# Altium PCB 第二版PCB.pcbdoc (part 2 of 2)
Units mm, origin at the board's own origin, x right, y up, seen from the top; angles counter-clockwise.
Board outline 100 x 24 mm, 4 copper layers (Top Layer, GND, VCC, Bottom Layer), stack 0.568 mm thick; 97 components, 63 nets, 363 pads, 297 vias.
Unrouted connection lines stored in the file: 80.
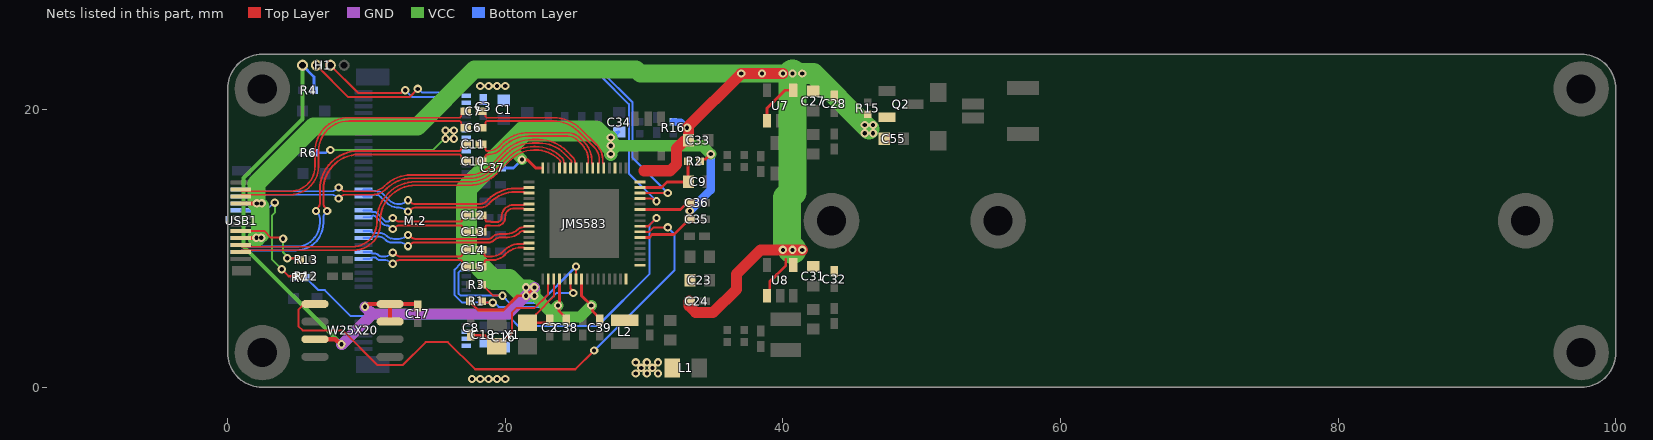
[diagram p4: the nets of this part, all layers, seen from the top]

## Via types
v1: diameter 0.6, hole 0.3, Top Layer to Bottom Layer, tented both sides, 297 vias

## Nets (pads, with @x,y where several pads share a name; then routed paths per layer and width w, separated by ;. In a path a pad name is that pad's centre, name@x,y a point inside that pad or via, vN(x,y) a via of type N, cw(c..) or ccw(c..) an arc to the next point about the centre after c; other vN are vias at no path point) (continued)
GPIO3: JMS583.7 W25X20.1 | length 40.7
  Top Layer w0.15: W25X20.1@6.295,6.005 5.515,6.005 5.095,5.584 5.095,4.405 5.4,4.1 8.3,4.1 10.8,1.6 12.6,1.6 14.26,3.26 15.866,3.26 17.826,1.3 25.05,1.3 v1(26.4,2.65) ; JMS583.7@29.7,11.2 30.366,11.2 30.686,11.52 v1(31.7,11.52)
  Bottom Layer w0.15: v1(26.4,2.65) 32.195,8.445 32.195,11.025 v1@31.705,11.515
GPIO4: JMS583.8 R7.1 | length 33.4
  Top Layer w0.15: JMS583.8@29.7,11.6 30.3,11.6 v1(30.9,12.2)
  Bottom Layer w0.15: R7.1@5.633,7.9 6.508,7.025 6.944,7.025 6.969,7 7,7 8.875,5.125 10.543,5.125 10.703,4.965 20.403,4.965 20.948,4.42 26.643,4.42 30.4,8.177 30.4,11.7 v1(30.9,12.2)
GPIO8: H1.3 JMS583.13 | length 33.2
  Top Layer w0.15: H1.3@7.4,23.2 9.4,21.2 12.487,21.2 12.687,21.4 v1(12.8,21.4) ; JMS583.13@29.7,13.6 30.578,13.6 30.778,13.4 v1(30.9,13.4)
  Bottom Layer w0.15: v1(12.8,21.4) 13.3,20.9 16,20.9 17.5,22.4 26.9,22.4 28.9,20.4 28.9,15.4 v1(30.9,13.4)
GPIO9: H1.2 JMS583.14 | length 35.2
  Top Layer w0.15: H1.2@6.4,23.2 8.697,20.903 13.103,20.903 v1(13.7,21.5) ; JMS583.14@29.7,14 v1(31.7,14)
  Bottom Layer w0.15: v1(13.7,21.5) 13.735,21.5 14.013,21.223 15.823,21.223 17.3,22.7 27,22.7 29.17,20.53 29.17,16.53 v1(31.7,14)
LXO: JMS583.64 L2.2
M.2_3V3: C1.1 C3.2 C16.1 C18.2 L1.2 M.2.2 M.2.4 M.2.12 M.2.14 M.2.16 M.2.18 M.2.70 M.2.72 M.2.74 R6.1 | length 9.5
  VCC w0.15: v1(7.4,17.1) 14.8,17.1 15.4,17.7
  Bottom Layer w0.15: R6.1@6.233,16.9 7.078,16.9 7.278,17.1 v1(7.4,17.1)
  other v1: 17.6,0.6 18.2,0.6 18.8,0.6 19.4,0.6 20,0.6 29.4,1 30.2,1 31,1 29.8,1.4 30.6,1.4 29.4,1.8 30.2,1.8 31,1.8 15.7,17.9 16.3,17.9 15.7,18.5 16.3,18.5 18.2,21.7 18.8,21.7 19.4,21.7 20,21.7
N_P0_TX_N: C14.2 M.2.47 | length 7.9
  Top Layer w0.14: v1(11.9,9.7) cw(c11.9,9.599) 11.972,9.67 12.077,9.565 ccw(c12.403,9.891) 12.403,9.43 16.762,9.43 ccw(c16.762,9.57) 16.861,9.471 ccw(c16.762,9.57) 16.902,9.57 16.902,9.606 cw(c17.129,9.606) C14.2@16.968,9.766 ; C14.2@16.968,9.766 17.064,9.862 cw(c17.155,9.772) C14.2@17.155,9.9
  Bottom Layer w0.14: M.2.47@9.8,9.75 10.215,9.75 cw(c10.215,9.545) 10.36,9.69 ccw(c10.505,9.835) 10.505,9.63 10.611,9.63 cw(c10.611,9.289) 10.853,9.53 ccw(c11.094,9.771) 11.094,9.43 11.27,9.43 ccw(c11.27,10.197) 11.813,9.655 11.828,9.67 cw(c11.9,9.599) v1(11.9,9.7)
N_P0_TX_P: C15.2 M.2.49 | length 7.9
  Top Layer w0.14: v1(11.9,8.9) ccw(c11.9,9.001) 11.972,8.93 12.077,9.035 cw(c12.403,8.709) 12.403,9.17 16.762,9.17 cw(c16.762,9.03) 16.861,9.129 cw(c16.762,9.03) 16.902,9.03 16.902,8.994 ccw(c17.129,8.994) C15.2@16.968,8.834 ; C15.2@16.968,8.834 17.064,8.738 ccw(c17.155,8.828) C15.2@17.155,8.7
  Bottom Layer w0.14: M.2.49@9.8,9.25 10.215,9.25 ccw(c10.215,9.455) 10.36,9.31 cw(c10.505,9.165) 10.505,9.37 10.533,9.37 cw(c10.533,9.098) 10.725,9.29 10.745,9.27 ccw(c10.986,9.511) 10.986,9.17 11.248,9.17 cw(c11.248,8.35) 11.828,8.93 ccw(c11.9,9.001) v1(11.9,8.9)
N_P1_TX_N: C12.2 M.2.35 | length 8.1
  Top Layer w0.14: v1(11.9,12.2) cw(c11.9,12.099) 11.972,12.17 12.077,12.065 ccw(c12.403,12.391) 12.403,11.93 16.762,11.93 ccw(c16.762,12.07) 16.861,11.971 ccw(c16.762,12.07) 16.902,12.07 16.902,12.106 cw(c17.129,12.106) C12.2@16.968,12.266 ; C12.2@16.968,12.266 17.064,12.363 cw(c17.155,12.272) C12.2@17.155,12.4
  Bottom Layer w0.14: M.2.35@9.8,12.75 10.215,12.75 cw(c10.215,12.545) 10.36,12.69 ccw(c10.505,12.835) 10.505,12.63 10.553,12.63 cw(c10.553,12.309) 10.78,12.536 11.314,12.002 ; 11.314,12.001 ccw(c11.487,12.174) 11.487,11.93 ccw(c11.487,12.174) 11.659,12.001 11.828,12.17 cw(c11.9,12.099) v1(11.9,12.2)
N_P1_TX_P: C13.2 M.2.37 | length 8.1
  Top Layer w0.14: v1(11.9,11.4) ccw(c11.9,11.501) 11.972,11.43 12.077,11.535 cw(c12.403,11.209) 12.403,11.67 16.762,11.67 cw(c16.762,11.53) 16.861,11.629 cw(c16.762,11.53) 16.902,11.53 16.902,11.494 ccw(c17.129,11.494) C13.2@16.968,11.334 ; C13.2@16.968,11.334 17.064,11.238 ccw(c17.155,11.328) C13.2@17.155,11.2
  Bottom Layer w0.14: M.2.37@9.8,12.25 10.209,12.25 ccw(c10.209,12.469) 10.364,12.314 cw(c10.499,12.179) 10.499,12.37 cw(c10.499,12.179) 10.634,12.314 11.168,11.78 ccw(c11.433,12.044) 11.433,11.67 cw(c11.433,11.296) 11.698,11.56 11.828,11.43 ccw(c11.9,11.501) v1(11.9,11.4)
P0_RX_N: JMS583.41 M.2.41 | length 12.4
  Top Layer w0.14: v1(13,10.97) cw(c13,10.869) 13.072,10.94 13.177,10.835 ccw(c13.503,11.161) 13.503,10.7 18.316,10.7 ; 18.317,10.7 18.316,10.7 ; JMS583.41@21.7,11.6 21.45,11.6 ccw(c21.45,11.481) 21.365,11.565 cw(c21.28,11.65) 21.28,11.53 ccw(c21.28,11.008) 20.911,11.377 cw(c20.146,12.143) 20.146,11.06 19.683,11.06 ccw(c19.683,10.117) 19.016,10.784 cw(c18.814,10.986) 18.814,10.7 18.316,10.7
  Bottom Layer w0.14: M.2.41@9.8,11.25 10.215,11.25 cw(c10.215,11.045) 10.36,11.19 ccw(c10.505,11.335) 10.505,11.13 10.932,11.13 cw(c10.932,10.396) 11.451,10.915 ccw(c11.97,11.434) 11.97,10.7 12.348,10.7 ccw(c12.348,11.52) 12.928,10.94 cw(c13,10.869) v1(13,10.97)
P0_RX_P: JMS583.42 M.2.43 | length 12.4
  Top Layer w0.14: v1(13,10.17) ccw(c13,10.271) 13.072,10.2 13.177,10.305 cw(c13.503,9.979) 13.503,10.44 18.413,10.44 ; 18.423,10.44 18.814,10.44 ccw(c18.814,10.986) 19.2,10.6 cw(c19.683,10.117) 19.683,10.8 20.146,10.8 ccw(c20.146,12.143) 21.095,11.193 cw(c21.28,11.008) 21.28,11.27 cw(c21.28,11.151) 21.365,11.235 ccw(c21.45,11.32) 21.45,11.2 JMS583.42@21.7,11.2
  Bottom Layer w0.14: M.2.43@9.8,10.75 10.215,10.75 ccw(c10.215,10.955) 10.36,10.81 cw(c10.505,10.665) 10.505,10.87 10.774,10.87 cw(c10.774,10.015) 11.379,10.62 11.411,10.587 ccw(c11.766,10.943) 11.766,10.44 12.348,10.44 cw(c12.348,9.62) 12.928,10.2 ccw(c13,10.271) v1(13,10.17)
P0_TX_N: C14.1 JMS583.44 | length 4
  Top Layer w0.14: C14.1@18.245,9.9 cw(c18.245,9.772) 18.335,9.863 18.406,9.792 cw(c18.184,9.57) 18.498,9.57 ccw(c18.638,9.57) 18.539,9.471 ccw(c18.638,9.57) 18.638,9.43 19.036,9.43 ccw(c19.036,10.531) 19.815,9.753 19.943,9.88 cw(c21.029,8.794) 21.029,10.33 21.28,10.33 ccw(c21.28,10.449) 21.365,10.365 cw(c21.45,10.28) 21.45,10.4 JMS583.44@21.7,10.4
P0_TX_P: C15.1 JMS583.45 | length 4
  Top Layer w0.14: C15.1@18.245,8.7 ccw(c18.245,8.828) 18.336,8.737 18.406,8.808 ccw(c18.184,9.03) 18.498,9.03 cw(c18.638,9.03) 18.539,9.129 cw(c18.638,9.03) 18.638,9.17 19.09,9.17 ccw(c19.09,10.401) 19.961,9.531 20.05,9.62 cw(c21.137,8.534) 21.137,10.07 21.28,10.07 cw(c21.28,9.95) 21.365,10.035 ccw(c21.45,10.119) 21.45,10 JMS583.45@21.7,10
P1_RX_N: JMS583.34 M.2.29 | length 12.7
  Top Layer w0.14: v1(13,13.47) cw(c13,13.369) 13.072,13.44 13.177,13.335 ccw(c13.503,13.661) 13.503,13.2 18.172,13.2 ccw(c18.172,13.828) 18.616,13.384 18.742,13.51 cw(c20.722,11.53) 20.722,14.33 21.28,14.33 ccw(c21.28,14.449) 21.365,14.365 cw(c21.45,14.28) 21.45,14.4 JMS583.34@21.7,14.4
  Bottom Layer w0.14: M.2.29@9.8,14.25 10.215,14.25 cw(c10.215,14.045) 10.36,14.19 ccw(c10.505,14.335) 10.505,14.13 10.703,14.13 cw(c10.703,13.447) 11.186,13.93 11.61,13.506 ccw(c12.348,14.244) 12.348,13.2 ccw(c12.348,14.02) 12.928,13.44 cw(c13,13.369) v1(13,13.47)
P1_RX_P: JMS583.35 M.2.31 | length 12.7
  Top Layer w0.14: v1(13,12.67) ccw(c13,12.771) 13.072,12.7 13.177,12.805 cw(c13.503,12.479) 13.503,12.94 18.172,12.94 ccw(c18.172,13.828) 18.8,13.2 18.926,13.326 cw(c20.722,11.53) 20.722,14.07 21.28,14.07 cw(c21.28,13.95) 21.365,14.035 ccw(c21.45,14.119) 21.45,14 JMS583.35@21.7,14
  Bottom Layer w0.14: M.2.31@9.8,13.75 10.215,13.75 ccw(c10.215,13.955) 10.36,13.81 cw(c10.505,13.665) 10.505,13.87 10.649,13.87 cw(c10.649,13.317) 11.04,13.708 11.426,13.322 ccw(c12.348,14.244) 12.348,12.94 cw(c12.348,12.12) 12.928,12.7 ccw(c13,12.771) v1(13,12.67)
P1_TX_N: C12.1 JMS583.37 | length 4.5
  Top Layer w0.14: C12.1@18.245,12.4 cw(c18.245,12.098) 18.458,12.312 18.478,12.292 cw(c18.256,12.07) 18.57,12.07 ccw(c18.71,12.07) 18.611,11.971 ccw(c18.71,12.07) 18.71,11.93 18.937,11.93 cw(c18.937,11.879) 18.973,11.915 ccw(c19.009,11.951) 19.009,11.9 19.4,11.9 ccw(c19.4,12.24) 19.74,12.24 19.74,12.3 cw(c20.57,12.3) 20.57,13.13 21.28,13.13 ccw(c21.28,13.25) 21.365,13.165 cw(c21.45,13.081) 21.45,13.2 JMS583.37@21.7,13.2
P1_TX_P: C13.1 JMS583.38 | length 4.5
  Top Layer w0.14: C13.1@18.245,11.2 ccw(c18.245,11.502) 18.458,11.288 18.478,11.308 ccw(c18.256,11.53) 18.57,11.53 cw(c18.71,11.53) 18.611,11.629 cw(c18.71,11.53) 18.71,11.67 18.829,11.67 cw(c18.829,11.619) 18.865,11.655 ccw(c18.901,11.691) 18.901,11.64 19.4,11.64 ccw(c19.4,12.24) 20,12.24 20,12.3 cw(c20.57,12.3) 20.57,12.87 21.28,12.87 cw(c21.28,12.75) 21.365,12.835 ccw(c21.45,12.92) 21.45,12.8 JMS583.38@21.7,12.8
PCIE_CLK: JMS583.55 M.2.52 R3.1 | length 14.7
  Top Layer w0.15: R3.1@18.333,7.4 18.346,7.4 19.146,6.6 v1(19.8,6.6) ; JMS583.55@25.1,7.8 v1(25.1,8.7)
  Bottom Layer w0.15: M.2.52@17.2,8.5 17.125,8.425 16.807,8.425 16.625,8.243 16.625,6.757 16.782,6.6 v1(19.8,6.6) 20.33,6.07 22.47,6.07 v1(25.1,8.7)
PCIE_RST: JMS583.54 M.2.50 R1.1 | length 14.1
  Top Layer w0.15: R1.1@18.333,6.2 18.433,6.1 v1(19.1,6.1) ; JMS583.54@24.7,7.8 24.7,7.122 24.9,6.922 v1(24.9,6.8)
  Bottom Layer w0.15: M.2.50@17.2,9 17.125,8.925 16.807,8.925 16.355,8.473 16.355,6.645 16.9,6.1 19.222,6.1 19.522,5.8 22.7,5.8 23.7,6.8 v1(24.9,6.8)
RST: C9.2 JMS583.15 R2.2 | length 5.2
  Top Layer w0.2: JMS583.15@29.7,14.4 31.25,14.4 31.65,14.8 C9.2@33.2,14.8 33.167,14.833 R2.2@33.167,16.3
RX1_N: JMS583.27 USB1.A3 | length 26.4
  Top Layer w0.125: v1(8,13.6) ccw(c8,13.674) 8.053,13.622 8.174,13.743 cw(c8.499,13.418) 8.499,13.877 10.388,13.877 ccw(c10.388,15.412) 11.473,14.327 cw(c13.231,12.569) 13.231,15.055 14.799,15.055 ; 15.001,15.055 14.799,15.055 ; JMS583.27@24.7,15.8 24.7,16.045 cw(c24.832,16.045) 24.739,16.139 ccw(c24.645,16.232) 24.778,16.232 ccw(c24.58,16.232) 24.72,16.372 24.236,16.856 ccw(c22.44,15.06) 22.44,17.6 21.952,17.6 ccw(c21.952,15.06) 20.156,16.856 19,15.7 cw(c17.443,17.257) 17.443,15.055 14.799,15.055
  Bottom Layer w0.125: USB1.A3@0.95,13.75 cw(c1.077,13.75) 1.077,13.877 7.495,13.877 cw(c7.495,13.404) 7.83,13.739 7.947,13.622 ccw(c8,13.674) v1(8,13.6)
RX1_P: JMS583.26 USB1.A2 | length 26.6
  Top Layer w0.125: v1(8,14.4) cw(c8,14.325) 8.053,14.378 8.174,14.257 ccw(c8.499,14.581) 8.499,14.122 10.388,14.122 ccw(c10.388,15.412) 11.3,14.5 cw(c13.231,12.569) 13.231,15.3 17.443,15.3 ccw(c17.443,17.257) 18.827,15.873 19.983,17.029 cw(c21.952,15.06) 21.952,17.845 22.44,17.845 cw(c22.44,15.06) 24.409,17.029 24.893,16.545 cw(c24.58,16.232) 25.023,16.232 ccw(c25.155,16.232) 25.061,16.139 cw(c24.968,16.045) 25.1,16.045 JMS583.26@25.1,15.8
  Bottom Layer w0.125: USB1.A2@0.95,14.25 ccw(c1.077,14.25) 1.077,14.122 7.495,14.122 ccw(c7.495,14.596) 7.83,14.261 7.947,14.378 cw(c8,14.325) v1(8,14.4)
RX2_N: JMS583.28 USB1.B3 | length 27.8
  Top Layer w0.125: USB1.B3@0.95,10.25 ccw(c1.077,10.25) 1.077,10.122 8.977,10.122 ccw(c8.977,11.9) 10.755,11.9 10.755,12.015 cw(c13.54,12.015) 13.54,14.8 17.401,14.8 ccw(c17.401,17.34) 19.198,15.544 20.247,16.594 cw(c22.061,14.78) 22.061,17.345 ; 22.09,17.345 22.162,17.345 cw(c22.162,14.615) 24.093,16.545 cw(c23.78,16.232) 24.222,16.232 ccw(c24.355,16.232) 24.261,16.139 cw(c24.168,16.045) 24.3,16.045 JMS583.28@24.3,15.8
RX2_P: JMS583.29 USB1.B2 | length 27.4
  Top Layer w0.125: USB1.B2@0.95,9.75 cw(c1.077,9.75) 1.077,9.877 9.079,9.877 ccw(c9.079,11.799) 11,11.799 11,12.015 cw(c13.54,12.015) 13.54,14.555 17.401,14.555 ccw(c17.401,17.34) 19.371,15.371 20.41,16.41 cw(c22.077,14.743) 22.077,17.1 22.162,17.1 cw(c22.162,14.615) 23.919,16.372 cw(c23.78,16.232) 23.977,16.232 cw(c23.845,16.232) 23.939,16.139 ccw(c24.032,16.045) 23.9,16.045 JMS583.29@23.9,15.8
TX1_N: C6.2 JMS583.22 | length 10.9
  Top Layer w0.125: C6.2@18.245,18.7 ccw(c18.245,19.002) 18.458,18.788 18.508,18.838 ccw(c18.34,19.006) 18.578,19.006 18.578,19.052 cw(c18.703,19.052) 18.614,19.141 cw(c18.703,19.052) 18.703,19.178 23.47,19.178 cw(c23.47,16.638) 25.266,18.434 25.728,17.972 ; 25.872,17.828 25.728,17.972 ; JMS583.22@26.7,15.8 26.7,16.045 cw(c26.832,16.045) 26.739,16.139 ccw(c26.645,16.232) 26.778,16.232 26.778,16.399 ccw(c25.513,16.399) 26.407,17.293 25.728,17.972
TX1_P: C7.2 JMS583.21 | length 11.1
  Top Layer w0.125: C7.2@18.245,19.9 cw(c18.245,19.598) 18.458,19.812 18.508,19.762 cw(c18.34,19.594) 18.578,19.594 18.578,19.548 ccw(c18.703,19.548) 18.614,19.459 ccw(c18.703,19.548) 18.703,19.423 23.47,19.423 cw(c23.47,16.637) 25.44,18.607 26.58,17.466 cw(c25.513,16.399) 27.023,16.399 27.023,16.232 ccw(c27.155,16.232) 27.061,16.139 cw(c26.968,16.045) 27.1,16.045 JMS583.21@27.1,15.8
TX2_N: C11.2 JMS583.23 | length 10.4
  Top Layer w0.125: C11.2@18.245,17.5 cw(c18.245,17.198) 18.458,17.412 18.508,17.362 cw(c18.34,17.194) 18.578,17.194 18.578,17.148 ccw(c18.703,17.148) 18.614,17.059 ccw(c18.703,17.148) 18.703,17.023 18.8,17.023 ccw(c18.8,18.043) 19.521,17.321 19.6,17.4 19.729,17.529 cw(c21.699,15.56) 21.699,18.345 24.476,18.345 cw(c24.476,17.076) 25.373,17.973 25.71,17.636 cw(c24.474,16.4) 26.222,16.4 26.222,16.232 ccw(c26.355,16.232) 26.261,16.139 cw(c26.168,16.045) 26.3,16.045 JMS583.23@26.3,15.8
TX2_P: C10.2 JMS583.24 | length 10
  Top Layer w0.125: C10.2@18.245,16.3 ccw(c18.245,16.602) C10.2@18.458,16.388 ; C10.2@18.459,16.388 18.508,16.438 ccw(c18.34,16.606) 18.578,16.606 18.578,16.652 cw(c18.703,16.652) 18.614,16.741 cw(c18.703,16.652) 18.703,16.778 18.8,16.778 ccw(c18.8,18.042) 19.694,17.148 19.903,17.356 cw(c21.699,15.56) 21.699,18.1 24.476,18.1 cw(c24.476,17.076) 25.2,17.8 25.537,17.463 cw(c24.474,16.4) 25.977,16.4 25.977,16.232 cw(c25.845,16.232) 25.939,16.139 ccw(c26.032,16.045) 25.9,16.045 JMS583.24@25.9,15.8
U_CC1: R12.1 USB1.A5 | length 9.4
  Top Layer w0.15: v1(3.9,8.5) 4.4,8 R12.1@5.234,8
  VCC w0.15: v1(3.4,13.303) 3.4,12.585 3.205,12.39 3.205,9.195 v1(3.9,8.5)
  Bottom Layer w0.15: USB1.A5@0.95,12.75 2.767,12.75 3.319,13.303 v1(3.4,13.303)
U_CC2: R13.1 USB1.B5 | length 5.8
  Top Layer w0.15: USB1.B5@0.95,11.25 1.85,11.25 1.87,11.27 2.63,11.27 3.116,10.784 3.916,10.784 v1(4,10.7) ; v1(4.3,9.3) 5.134,9.3 R13.1@5.234,9.2
  VCC w0.15: v1(4,10.7) 4,9.713 4.3,9.413 v1(4.3,9.3)
U_TX1_N: C6.1 USB1.B10 | length 20.2
  Top Layer w0.125: USB1.B10@0.95,13.75 cw(c1.077,13.75) 1.077,13.877 4.5,13.877 ccw(c4.5,15.922) 6.545,15.922 6.545,17 cw(c8.723,17) 8.723,19.178 11.199,19.178 ; 11.401,19.178 11.199,19.178 ; C6.1@16.941,18.788 16.892,18.838 cw(c17.06,19.006) 16.822,19.006 16.822,19.052 ccw(c16.697,19.052) 16.786,19.141 ccw(c16.697,19.052) 16.697,19.178 11.199,19.178 ; C6.1@16.942,18.788 ccw(c17.155,19.002) C6.1@17.155,18.7
U_TX1_P: C7.1 USB1.B11 | length 20
  Top Layer w0.125: USB1.B11@0.95,14.25 ccw(c1.077,14.25) 1.077,14.122 4.5,14.122 ccw(c4.5,15.922) 6.3,15.922 6.3,17 cw(c8.723,17) 8.723,19.423 16.697,19.423 ccw(c16.697,19.548) 16.786,19.459 ccw(c16.697,19.548) 16.822,19.548 16.822,19.594 cw(c17.06,19.594) 16.892,19.762 C7.1@16.941,19.812 ; C7.1@16.942,19.812 cw(c17.155,19.598) C7.1@17.155,19.9
U_TX2_N: C11.1 USB1.A10 | length 21.7
  Top Layer w0.14: v1(6.37,12.7) cw(c6.671,12.7) 6.458,12.912 6.565,13.02 ccw(c6.385,13.2) 6.64,13.2 6.64,14.23 cw(c9.44,14.23) 9.44,17.03 16.69,17.03 ccw(c16.69,17.17) 16.789,17.071 ccw(c16.69,17.17) 16.83,17.17 16.83,17.206 cw(c17.057,17.206) 16.896,17.366 C11.1@16.941,17.412 ; C11.1@16.942,17.412 cw(c17.155,17.198) C11.1@17.155,17.5
  Bottom Layer w0.14: USB1.A10@0.95,10.25 ccw(c1.07,10.25) 1.07,10.13 4.93,10.13 ccw(c4.93,11.84) 6.64,11.84 6.64,12.2 ccw(c6.186,12.2) 6.507,12.521 6.4,12.628 cw(c6.471,12.7) v1(6.37,12.7)
U_TX2_P: C10.1 USB1.A11 | length 21.7
  Top Layer w0.14: v1(7.17,12.7) ccw(c6.869,12.7) 7.082,12.912 6.975,13.02 cw(c7.155,13.2) 6.9,13.2 6.9,14.23 cw(c9.44,14.23) 9.44,16.77 16.69,16.77 cw(c16.69,16.63) 16.789,16.729 cw(c16.69,16.63) 16.83,16.63 16.83,16.594 ccw(c17.057,16.594) 16.896,16.434 C10.1@16.941,16.388 ; C10.1@16.942,16.388 ccw(c17.155,16.602) C10.1@17.155,16.3
  Bottom Layer w0.14: USB1.A11@0.95,9.75 cw(c1.07,9.75) 1.07,9.87 4.93,9.87 ccw(c4.93,11.84) 6.9,11.84 6.9,12.2 cw(c7.354,12.2) 7.033,12.521 7.14,12.628 ccw(c7.069,12.7) v1(7.17,12.7)
VBUS: C23.2 C24.2 C27.2 C28.2 C31.2 C32.2 C33.2 C55.2 JMS583.1 JMS583.16 Q2.2 R15.1 R16.1 U7.1 U7.4 U8.1 U8.4 USB1.A4 USB1.A9 USB1.B4 USB1.B9 | length 106.6
  Top Layer w0.2: U8.1@38.85,6.6 39.05,6.8 39.05,7.604 40.2,8.754 40.2,9.2 ; U7.1@38.85,19.2 38.85,20.1 40.15,21.4 U7.4@40.75,21.4
  Top Layer w0.3: USB1.B4@0.95,10.75 2.4,10.75 v1(2.425,10.775) ; USB1.B9@0.95,13.25 1.7,13.25 v1(2.1,13.25) v1(2.45,13.25)
  Top Layer w0.8: 30,15.6 31.866,15.6 32.334,16.069 32.334,17.216 32.869,17.75 33.2,17.75 C33.2@33.2,17.8 ; C33.2@33.2,17.85 33.2,18.6 v1(33.1,18.7) v1(37,22.6) v1(38.5,22.6) v1(39.997,22.6) ; C24.2@33.255,6.2 33.255,5.847 33.722,5.38 34.968,5.38 36.645,7.057 36.645,8.173 38.372,9.9 v1(39.997,9.9) v1(40.697,9.9) v1(41.397,9.9)
  VCC w1.3: v1(2.075,10.775) 2.35,11.05 2.35,13 v1(2.1,13.25) ; v1@2.075,13.25 2.075,14.688 6.187,18.8 13.669,18.8 17.769,22.9 29.434,22.9 29.734,22.6 v1(37,22.6) 40.7,22.6 v1@41.4,22.6
  VCC w1.5: v1(40.697,22.6) 40.7,22.6 v1(41.397,22.6) ; 41.755,22.6 v1(41.397,22.6) ; 46.2,18.6 v1(45.9,18.9) 42.2,22.6 v1(41.397,22.6)
  VCC w2: v1@40.7,9.9 40.3,10.3 40.3,13.65 40.7,14.05 v1@40.7,22.6
  Bottom Layer w0.3: USB1.A9@0.95,10.75 2.4,10.75 v1(2.425,10.775) ; USB1.A4@0.95,13.25 v1(2.45,13.25)
  Bottom Layer w0.5: R16.1@32.1,19.133 32.1,19.12 32.12,19.1 32.673,19.1 33.073,18.7 v1(33.1,18.7)
  other v1: 45.9,18.3 46.5,18.3 46.5,18.9
VCC: C17.2 C34.2 C35.2 C36.2 C37.2 C38.2 C39.2 H1.1 JMS583.6 JMS583.11 JMS583.19 JMS583.32 JMS583.52 JMS583.56 R1.2 R2.1 R4.1 W25X20.3 W25X20.7 W25X20.8 | length 121.7
  Top Layer w0.2: R1.2@17.467,6.2 17.48,6.2 17.65,6.03 17.65,5.964 18.034,5.58 19.88,5.58 20.9,6.6 v1(21.5,6.6) v1(22.1,7.2) ; v1(21.2,16.4) 21.224,16.376 21.624,16.376 22.2,15.8 JMS583.32@22.7,15.8 ; JMS583.52@23.9,7.8 23.9,6.108 23.8,6.008 v1(23.8,5.9) 23.877,5.823 23.877,5.494 24.4,4.97 C38.2@24.4,4.845 ; JMS583.56@25.5,7.8 25.5,6.6 v1(26.2,5.9) 26.277,5.823 26.277,5.494 26.8,4.97 C39.2@26.8,4.845 ; JMS583.6@29.7,10.8 30.383,10.8 30.583,11 32.155,11 32.96,11.805 32.96,11.93 33.13,12.1 C35.2@33.255,12.1 33.3,12.145 v1(33.3,12.7) 33.3,13.255 C36.2@33.255,13.3 33.13,13.3 32.63,12.8 JMS583.11@29.7,12.8 ; R2.1@34.033,16.3 34.158,16.426 34.426,16.426 v1(34.8,16.8)
  Top Layer w0.3: W25X20.3@6.295,3.465 7.756,3.465 8.121,3.1 v1(8.2,3.1) ; v1(9.9,5.8) 9.981,5.8 10.186,6.005 W25X20.8@11.705,6.005 ; W25X20.7@11.705,4.735 W25X20.8@11.705,6.005 ; C17.2@13.7,5.845 13.7,5.885 13.58,6.005 W25X20.8@11.705,6.005
  GND w0.8: v1(8.2,3.1) 8.24,3.1 10.42,5.28 ; v1(9.9,5.8) 10.42,5.28 ; v1(22.1,7.2) v1(21.5,6.6) 20.18,5.28 10.42,5.28
  VCC w0.3: H1.1@5.4,23.198 5.4,19.314 1.155,15.069 1.155,10.145 v1(8.2,3.1)
  VCC w0.8: 20.246,17.354 v1(21.2,16.4) ; v1(22.1,6.6) 23.62,5.08 ; v1(23.8,5.9) 23.62,5.72 23.62,5.08 ; v1(26.2,5.9) 25.38,5.08 23.62,5.08 ; v1(27.6,17.4) 34.2,17.4 v1(34.8,16.8)
  VCC w1: v1(27.6,16.8) v1(27.6,17.4) v1(27.6,18)
  VCC w1.5: 21.8,6.9 21.67,7.03 21.025,7.03 20.285,7.77 19.13,7.77 17.2,9.7 17.2,14.309 20.246,17.354 21.361,18.47 26.53,18.47 v1(27.6,17.4)
  Bottom Layer w0.2: H1.1@5.4,23.2 6.233,22.367 R4.1@6.233,21.4 ; C37.2@19.645,15.8 20.6,15.8 v1(21.2,16.4) ; C34.2@27.859,18.259 v1(27.6,18) 27.708,18 27.808,18.1 27.9,18.1 C34.2@28.2,18.4 ccw(c28.2,17.917) C34.2@27.859,18.259
  Bottom Layer w0.6: v1(33.3,12.7) 34.8,14.2 v1(34.8,16.8)
  other v1: 21.5,7.2
XIN: C8.2 JMS583.50 X1.1 | length 9.4
  Top Layer w0.15: X1.1@19.4,2.95 19.5,2.95 20.5,3.95 20.5,5.4 20.8,5.7 22.1,5.7 23.075,6.675 23.075,7.775 JMS583.50@23.1,7.8
  Top Layer w0.2: C8.2@17.5,3.755 18.495,3.755 19.3,2.95 X1.1@19.4,2.95
XOUT: C2.2 JMS583.51 X1.3 | length 5.6
  Top Layer w0.15: X1.3@21.6,4.65 21.7,4.65 22.225,5.175 22.225,5.275 23.5,6.55 JMS583.51@23.5,7.8
  Top Layer w0.2: X1.3@21.7,4.65 23.03,4.65 23.2,4.82 C2.2@23.2,4.845
pads on no net: JMS583.9 JMS583.10 JMS583.12 JMS583.57 JMS583.58 JMS583.59 M.2.5 M.2.6 M.2.7 M.2.8 M.2.10 M.2.11 M.2.13 M.2.17 M.2.19 M.2.20 M.2.22 M.2.23 M.2.24 M.2.25 M.2.26 M.2.28 M.2.30 M.2.32 M.2.34 M.2.36 M.2.38 M.2.40 M.2.42 M.2.44 M.2.46 M.2.48 M.2.54 M.2.56 M.2.58 M.2.67 M.2.68 M.2.69 USB1.A8 USB1.B8

## Polygon pours and split planes (outlines as drawn)
GND on Bottom Layer "NONET_L-01_P-001" (solid, remove dead copper, pour order 3): 0,2.5 0,21.5 cw(c2.5,21.5) 2.5,24 97.5,24 cw(c97.5,21.5) 100,21.5 100,2.5 cw(c97.5,2.5) 97.5,0 2.5,0 cw(c2.5,2.5)
GND on Top Layer "NONET_L-01_P-001" (solid, remove dead copper, pour order 0): 0,2.5 0,21.5 cw(c2.5,21.5) 2.5,24 97.5,24 cw(c97.5,21.5) 100,21.5 100,2.5 cw(c97.5,2.5) 97.5,0 2.5,0 cw(c2.5,2.5)
GND on GND "NONET_L-01_P-001" (solid, remove dead copper, pour order 2): 0,2.5 0,21.5 cw(c2.5,21.5) 2.5,24 97.5,24 cw(c97.5,21.5) 100,21.5 100,2.5 cw(c97.5,2.5) 97.5,0 2.5,0 cw(c2.5,2.5)
GND on VCC "NONET_L-01_P-001" (solid, remove dead copper, pour order 1): 0,2.5 0,21.5 cw(c2.5,21.5) 2.5,24 97.5,24 cw(c97.5,21.5) 100,21.5 100,2.5 cw(c97.5,2.5) 97.5,0 2.5,0 cw(c2.5,2.5)

## Other copper
Top Layer:
  region net VBUS: 48.125,19.8 46.52,19.8 46.37,19.95 45.83,19.95 45.83,19.23 45.6,19 45.6,18.1 46.25,17.45 47.7,17.45 47.7,18.675 48.125,19.1
  region net $1N23334: 51.8,21.935 50.06,21.935 48.875,20.75 48.875,20.05 49.925,19 54.5,19 54.5,19.8 52.8,19.8 51.8,20.8
  region net VBUS: 33.2,19.4 32,18.2 32,17.35 32.8,17.35 33.5,18.05 33.5,19.4
  region net VBUS: 29.3,8.9 29.4,8.8 30.1,8.8 30.7,8.2 33.7,8.2 33.7,6.25 33.35,5.9 32,5.9 31.2,6.7 31,6.7 29.3,8.4
  region net GND: 0.325,14.75 0.175,14.9 0.175,17.6 0.475,17.9 1.575,17.9 1.775,17.7 1.775,14.9 1.625,14.75
  region net GND: 0.325,9.25 1.625,9.25 1.775,9.1 1.775,6.5 1.475,6.2 0.475,6.2 0.175,6.5 0.175,9.1
  region net VCC: 27.75,18.35 27.45,18.35 27.25,18.15 27.25,16.65 27.5,16.4 27.621,16.4 27.8,16.221 27.8,15.8 28,15.8 28,18.1
  region net VBUS: 29.3,14.7 30.1,14.7 30.6,15.3 30.6,16.1 29.9,16.1 29.3,15.5
  region net LXO: 28.6,8.2 28.6,7.2 28.3,6.9 28.3,5.6 27.7,5 27.7,4.4 29.5,4.4 29.6,4.5 29.6,7.6 29,8.2
  region net AVDDL: 27.6,3.6 29.7,3.6 30.2,4.1 30.7,4.1 31,3.8 32,3.8 32.3,3.5 32.3,3.4 31.2,2.3 28.6,2.3 28,2.9
  region net VBUS: 44.05,7.925 43.15,7.925 42.75,8.325 40.35,8.325 39.65,9.025 39.65,10.025 39.95,10.325 41.65,10.325 43.15,8.825 44.05,8.825
  region net M.2_3V3: 32.6,2.1 29.2,2.1 29.1,2 29.1,0.8 29.2,0.7 32.6,0.7
  region net 3V3: 33.4,2.1 36,2.1 37,3.1 37.239,3.3 41.3,3.3 41.7,3.7 41.7,4.6 43.1,4.6 43.5,5 44,5 44,2.6 42.1,0.7 33.4,0.7
  region net GND: 44,5.2 41.7,5.2 41.7,6.9 41.3,7.3 40.3,7.3 40.1,7.1 40.1,6.1 39.5,6.1 39.5,7.7 39.8,8 42.6,8 42.9,7.7 44,7.7
  region net $1N10317: 41.1,7.1 41.1,5.7 41.3,5.5 41.3,4.4 39.1,4.4 39.1,5.5 39.8,5.5 40.5,6.2 40.5,7.1
  region net AVDDL: 44,17.6 43.4,17.6 43,17.2 41.8,17.2 41.8,16.5 41.1,15.8 39.1,15.8 38.9,16 37.7,16 37.5,16.2 36.9,16.2 36.9,14 37.1,13.8 38.2,13.8 38.9,14.5 41.7,14.5 44,16.8
  region net $1N11538: 41.1,19.7 41.1,18.3 41.3,18.1 41.3,17 39.1,17 39.1,18.1 39.8,18.1 40.5,18.8 40.5,19.7
  region net GND: 44,17.8 41.7,17.8 41.7,19.5 41.3,19.9 40.3,19.9 40.1,19.7 40.1,18.7 39.5,18.7 39.5,20.3 39.8,20.6 42.6,20.6 42.9,20.3 44,20.3
  region net VBUS: 44.05,20.525 43.15,20.525 42.75,20.925 40.35,20.925 39.65,21.625 39.65,22.75 39.9,23 41.575,23 43.15,21.425 44.05,21.425
VCC:
  rectangle net AVDDL: 29.8,2.8 31.2,3.8
  region net VBUS: 40.7,22.6 40.7,20.1 43.8,20.1 44.2,20.5 42.1,22.6 41.755,22.6
  region net M.2_3V3: 31.2,2.2 16.8,2.2 16.8,0.8 17.3,0.3 30.9,0.3 31.5,0.9 31.5,1.9
  region net M.2_3V3: 20.4,21.8 20.1,22.1 18.1,22.1 15,19 15,17.4 15.3,17.1 16.5,17.1 16.8,17.4 16.8,18 20.4,21.6
  region net M.2_3V3: 20.1,0.3 20.6,0.8 20.6,1.3 18.8,3.1 18.5,3.1 16.1,5.5 16.1,16.7 16.8,17.4 16.8,19.1 15.1,19.1 14.4,18.4 14.4,4.1 16.8,1.7 16.8,0.8 17.3,0.3
Bottom Layer:
  region net GND: 0.325,14.75 0.175,14.9 0.175,17.6 0.475,17.9 1.575,17.9 1.775,17.7 1.775,14.9 1.625,14.75
  region net GND: 0.325,9.25 1.625,9.25 1.775,9.1 1.775,6.5 1.475,6.2 0.475,6.2 0.175,6.5 0.175,9.1
  region net M.2_3V3: 20.5,3.3 19.2,3.3 18.8,3.7 18.1,3.7 17.643,4.157 16.8,4.157 16.8,0.8 17.3,0.3 20.3,0.3 20.5,0.5 20.5,2.5
  region net M.2_3V3: 16.8,20.3 16.8,21 17.9,22.1 20.1,22.1 20.4,21.8 20.4,21.5 20.4,20.3 17.5,20.3
  region net M.2_3V3: 17.6,18.7 17.6,16.8 16.8,16.8 16.1,17.5 15.5,17.5 15.3,17.7 15.3,18.7 15.5,18.9 16.5,18.9 16.7,18.7

## Silkscreen, mask and mechanical layers (free items; w line width, h text height)
Bottom Silkscreen Layer:
  text "2230" at 47.046,7.354 h2
  text "2242" at 59.146,7.354 h2
  text "2280" at 97.146,7.354 h2
Mechanical Layer:
  drawing of 124 lines, arcs and shapes, not listed
  text "100" at 47.364,50.568 h2.5
  text "95" at 48.202,45.463 h2.5
  text "80" at 51.715,36.273 h2.5
  text "42" at 32.675,31.861 h2.5
  text "R2,5" at 101.837,29.091 h2.5 r38.14
  text "13,5" at 3.615,27.513 h2.5
  text "30" at 26.718,27.288 h2.5
  text "19" at 100.874,10.75 h2.5 r90
  text "24" at 106.203,10.75 h2.5 r90
  text "45" at 23.153,-3.367 h2.5
  text "∅4" at 86.806,-5.124 h2.5 r47.48
  text "∅2,05" at 102.136,-5.54 h2.5 r312.82
  text "57" at 29.212,-7.363 h2.5
  text "50" at 23.216,-11.082 h2.5
  text "62" at 29.218,-14.987 h2.5
Mechanical 2:
  circle w0.006: c97.5,21.5 r0.003
  circle w0.006: c99.466,23.044 r0.003
  circle w0.006: c62,-15.638 r0.003
  circle w0.006: c62,2.5 r0.003
  circle w0.006: c0,2.5 r0.003
  circle w0.006: c50,-11.733 r0.003
  circle w0.006: c50,2.5 r0.003
  circle w0.006: c0,2.5 r0.003
  circle w0.006: c59.5,-8.009 r0.003
  circle w0.006: c59.5,2.5 r0.003
  circle w0.006: c2.5,2.5 r0.003
  circle w0.006: c47.5,-4.013 r0.003
  circle w0.006: c47.5,2.5 r0.003
  circle w0.006: c2.5,2.5 r0.003
  circle w0.006: c13.5,26.636 r0.003
  circle w0.006: c13.5,21.5 r0.003
  circle w0.006: c0,21.5 r0.003
  circle w0.006: c98.852,3.974 r0.003
  circle w0.006: c96.148,1.026 r0.003
  circle w0.006: c96.803,3.252 r0.003
  circle w0.006: c98.197,1.748 r0.003
  circle w0.006: c109.888,0 r0.003
  circle w0.006: c97.5,0 r0.003
  circle w0.006: c97.5,24 r0.003
  circle w0.006: c104.449,2.5 r0.003
  circle w0.006: c97.5,2.5 r0.003
  circle w0.006: c97.5,21.5 r0.003
  circle w0.006: c97.5,44.811 r0.003
  circle w0.006: c97.5,21.5 r0.003
  circle w0.006: c2.5,21.5 r0.003
  circle w0.006: c100,49.917 r0.003
  circle w0.006: c100,21.5 r0.003
  circle w0.006: c0,21.5 r0.003
  circle w0.006: c93.5,35.621 r0.003
  circle w0.006: c93.5,12 r0.003
  circle w0.006: c13.5,12 r0.003
  circle w0.006: c55.5,31.231 r0.003
  circle w0.006: c55.5,12 r0.003
  circle w0.006: c13.5,12 r0.003
  circle w0.006: c43.5,26.636 r0.003
  circle w0.006: c43.5,12 r0.003
  circle w0.006: c13.5,12 r0.003